# Altium PCB Diode.PcbDoc
Units mm, origin at the board's own origin, x right, y up, seen from the top; angles counter-clockwise.
Board outline 199 x 10 mm, 2 copper layers (Top Layer, Bottom Layer); 40 components, 39 nets, 102 pads, 0 vias.
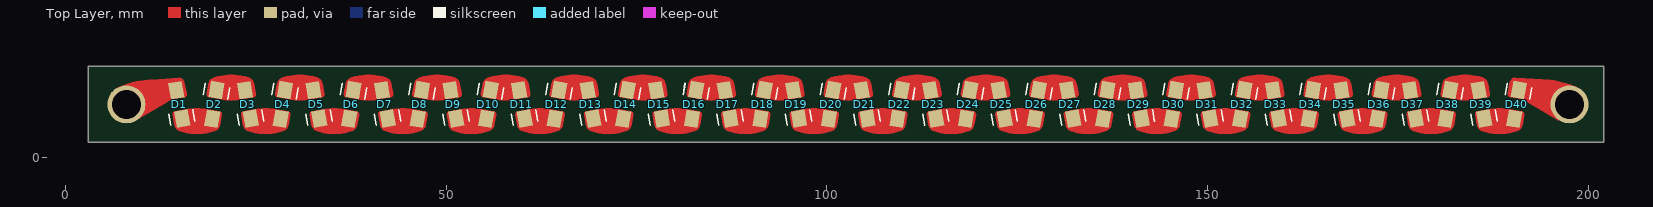
[diagram p0: Top Layer view]
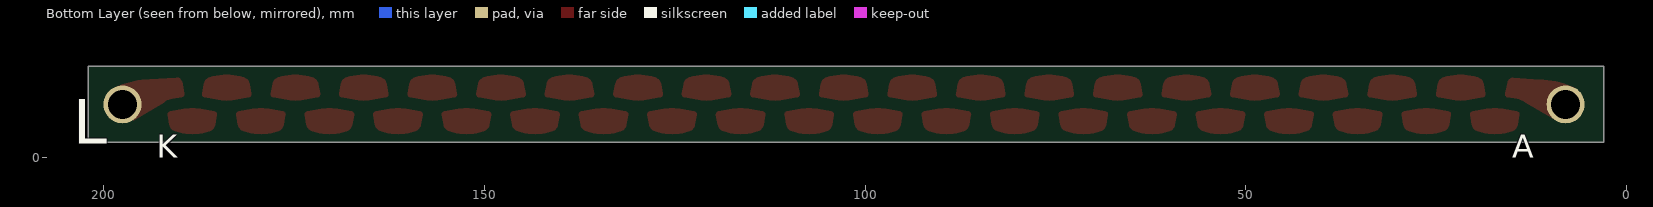
[diagram p1: Bottom Layer view, seen from below]

## Layer stack, top to bottom
Top Solder: solder mask 0.0102, Solder Resist, Dk 3.5
Top Layer: signal copper 0.0356
Dielectric 1: dielectric 0.32, FR-4, Dk 4.8
Bottom Layer: signal copper 0.0356
Bottom Solder: solder mask 0.0102, Solder Resist, Dk 3.5

## Board outline
3,2 202,2 202,12 3,12

## Design rules (kind name [scope] priority, off if disabled: settings)
Clearance [All] p1: gap=0.254 ignorepadtopadclearanceinfootprint=FALSE except(0: Arc-Hole Track-Hole SMDPad-Hole THPad-Hole Via-Hole Fill-Hole Poly-Hole Region-Hole Text-Hole)
PolygonConnect [All] p1: connectstyle=Relief reliefconductorwidth=0.254 reliefentries=4 polygonreliefangle="90 Angle" airgapwidth=0.254
RoutingVias [All] p1: holewidth=0.711 width=1.27 viastyle="Through Hole" minholewidth=0.711 minwidth=1.27 maxholewidth=0.711 maxwidth=1.27
SolderMaskExpansion [All] p1: expansion=0.102
Width [All] p1: maxlimit=0.254 minlimit=0.254 preferedwidth=0.254
30 further rules are at their usual default settings.

## Components (designator, comment, footprint, x,y, rotation, side; value= is the part's Value field where it differs from the comment)
D1 "US2MF" DO-214AC 15,7 r100 top
D2 "US2MF" DO-214AC 19.5,7 r260 top
D3 "US2MF" DO-214AC 24,7 r100 top
D4 "US2MF" DO-214AC 28.5,7 r260 top
D5 "US2MF" DO-214AC 33,7 r100 top
D6 "US2MF" DO-214AC 37.5,7 r260 top
D7 "US2MF" DO-214AC 42,7 r100 top
D8 "US2MF" DO-214AC 46.5,7 r260 top
D9 "US2MF" DO-214AC 51,7 r100 top
D10 "US2MF" DO-214AC 55.5,7 r260 top
D11 "US2MF" DO-214AC 60,7 r100 top
D12 "US2MF" DO-214AC 64.5,7 r260 top
D13 "US2MF" DO-214AC 69,7 r100 top
D14 "US2MF" DO-214AC 73.5,7 r260 top
D15 "US2MF" DO-214AC 78,7 r100 top
D16 "US2MF" DO-214AC 82.5,7 r260 top
D17 "US2MF" DO-214AC 87,7 r100 top
D18 "US2MF" DO-214AC 91.5,7 r260 top
D19 "US2MF" DO-214AC 96,7 r100 top
D20 "US2MF" DO-214AC 100.5,7 r260 top
D21 "US2MF" DO-214AC 105,7 r100 top
D22 "US2MF" DO-214AC 109.5,7 r260 top
D23 "US2MF" DO-214AC 114,7 r100 top
D24 "US2MF" DO-214AC 118.5,7 r260 top
D25 "US2MF" DO-214AC 123,7 r100 top
D26 "US2MF" DO-214AC 127.5,7 r260 top
D27 "US2MF" DO-214AC 132,7 r100 top
D28 "US2MF" DO-214AC 136.5,7 r260 top
D29 "US2MF" DO-214AC 141,7 r100 top
D30 "US2MF" DO-214AC 145.5,7 r260 top
D31 "US2MF" DO-214AC 150,7 r100 top
D32 "US2MF" DO-214AC 154.5,7 r260 top
D33 "US2MF" DO-214AC 159,7 r100 top
D34 "US2MF" DO-214AC 163.5,7 r260 top
D35 "US2MF" DO-214AC 168,7 r100 top
D36 "US2MF" DO-214AC 172.5,7 r260 top
D37 "US2MF" DO-214AC 177,7 r100 top
D38 "US2MF" DO-214AC 181.5,7 r260 top
D39 "US2MF" DO-214AC 186,7 r100 top
D40 "US2MF" DO-214AC 190.5,7 r260 top

## Footprints (in the part's own frame and the unit in brackets; to place one, negate y for a bottom-side part, rotate by r counter-clockwise, add the part's x,y. Pads: shape width x height; smd on the part's side, far side on the other; paste and mask are expansions set on the pad)
DO-214AC [mm] "SMA Diode"
  rect 2.2x1.8 smd: 1(-1.9,0) 2(1.9,0.1)
  silkscreen extent -2.5,-1.6 -1,1.65, body extent -2.8,-1.48 2.8,1.47, height 2.9

## Part data
D1 D2 D3 D4 D5 D6 D7 D8 D9 D10 D11 D12 D13 D14 D15 D16 D17 D18 D19 D20 D21 D22 D23 D24 D25 D26 D27 D28 D29 D30 D31 D32 D33 D34 D35 D36 D37 D38 D39 D40: "DIODE - HyperFast 1kV", JLC Availability=Extended, LCSC Part #=C108845, If=2A, Trr=75ns, Vrrm=1000

## Free pads (board coordinates)
  round 0 hole 2 slot 201 at 0 deg unplated: 34(102.5,1) 34(102.5,13)
  round 0 hole 0.762 unplated: 35(2.5,4) 35(2.5,5) 35(2.5,6) 35(2.5,7) 35(2.5,8) 35(2.5,9) 35(2.5,10) 35(202.5,4) 35(202.5,5) 35(202.5,6) 35(202.5,7) 35(202.5,8) 35(202.5,9) 35(202.5,10)
  round 1.524 hole 2 slot 4 at 90 deg unplated: 37(2,2) 37(2,12) 37(203,2) 37(203,12)
  round 5 hole 3.8: A(8,7) K(197.5,7)

## Nets (pads, with @x,y where several pads share a name; then routed paths per layer and width w, separated by ;. In a path a pad name is that pad's centre, name@x,y a point inside that pad or via, vN(x,y) a via of type N, cw(c..) or ccw(c..) an arc to the next point about the centre after c; other vN are vias at no path point)
NetD1_1: D1.1 D2.2
NetD2_1: D2.1 D3.2
NetD3_1: D3.1 D4.2
NetD4_1: D4.1 D5.2
NetD5_1: D5.1 D6.2
NetD6_1: D6.1 D7.2
NetD7_1: D7.1 D8.2
NetD8_1: D8.1 D9.2
NetD9_1: D9.1 D10.2
NetD10_1: D10.1 D11.2
NetD11_1: D11.1 D12.2
NetD12_1: D12.1 D13.2
NetD13_1: D13.1 D14.2
NetD14_1: D14.1 D15.2
NetD15_1: D15.1 D16.2
NetD16_1: D16.1 D17.2
NetD17_1: D17.1 D18.2
NetD18_1: D18.1 D19.2
NetD19_1: D19.1 D20.2
NetD20_1: D20.1 D21.2
NetD21_1: D21.1 D22.2
NetD22_1: D22.1 D23.2
NetD23_1: D23.1 D24.2
NetD24_1: D24.1 D25.2
NetD25_1: D25.1 D26.2
NetD26_1: D26.1 D27.2
NetD27_1: D27.1 D28.2
NetD28_1: D28.1 D29.2
NetD29_1: D29.1 D30.2
NetD30_1: D30.1 D31.2
NetD31_1: D31.1 D32.2
NetD32_1: D32.1 D33.2
NetD33_1: D33.1 D34.2
NetD34_1: D34.1 D35.2
NetD35_1: D35.1 D36.2
NetD36_1: D36.1 D37.2
NetD37_1: D37.1 D38.2
NetD38_1: D38.1 D39.2
NetD39_1: D39.1 D40.2
pads on no net: D1.2 D40.1

## Other copper
Top Layer:
  region net NetD31_1: 149.428,6.067 151.239,6.396 cw(c152.339,0.346) 153.439,6.396 155.25,6.067 cw(c155.179,5.675) 155.571,5.607 155.353,4.351 cw(c154.205,4.551) 154.56,3.441 cw(c152.339,10.396) 150.081,3.453 cw(c150.425,4.509) 149.331,4.319 149.107,5.607 cw(c149.499,5.675)
  region net NetD32_1: 159.731,7.925 157.92,7.596 cw(c156.82,13.646) 155.72,7.596 153.908,7.925 cw(c153.98,8.317) 153.587,8.386 153.806,9.641 cw(c154.953,9.441) 154.599,10.551 cw(c156.82,3.596) 159.077,10.539 cw(c158.734,9.483) 159.828,9.673 160.052,8.386 cw(c159.659,8.317)
  region net NetD34_1: 168.731,7.925 166.92,7.596 cw(c165.82,13.646) 164.72,7.596 162.908,7.925 cw(c162.98,8.317) 162.587,8.386 162.806,9.641 cw(c163.953,9.441) 163.599,10.551 cw(c165.82,3.596) 168.077,10.539 cw(c167.734,9.483) 168.828,9.673 169.052,8.386 cw(c168.659,8.317)
  region net NetD33_1: 158.428,6.067 160.239,6.396 cw(c161.339,0.346) 162.439,6.396 164.25,6.067 cw(c164.179,5.675) 164.571,5.607 164.353,4.351 cw(c163.205,4.551) 163.56,3.441 cw(c161.339,10.396) 159.081,3.453 cw(c159.425,4.509) 158.331,4.319 158.107,5.607 cw(c158.499,5.675)
  region net NetD30_1: 150.711,7.926 148.9,7.597 cw(c147.8,13.647) 146.7,7.597 144.889,7.926 cw(c144.96,8.318) 144.568,8.386 144.786,9.642 cw(c145.934,9.442) 145.579,10.552 cw(c147.8,3.597) 150.058,10.54 cw(c149.714,9.484) 150.808,9.674 151.032,8.386 cw(c150.64,8.318)
  region net NetD36_1: 177.711,7.926 175.9,7.597 cw(c174.8,13.647) 173.7,7.597 171.889,7.926 cw(c171.96,8.318) 171.568,8.386 171.786,9.642 cw(c172.934,9.442) 172.579,10.552 cw(c174.8,3.597) 177.058,10.54 cw(c176.714,9.484) 177.808,9.674 178.032,8.386 cw(c177.64,8.318)
  region net NetD39_1: 185.428,6.067 187.239,6.396 cw(c188.339,0.346) 189.439,6.396 191.25,6.067 cw(c191.179,5.675) 191.571,5.607 191.353,4.351 cw(c190.205,4.551) 190.56,3.441 cw(c188.339,10.396) 186.081,3.453 cw(c186.425,4.509) 185.331,4.319 185.107,5.607 cw(c185.499,5.675)
  region net NetD38_1: 186.731,7.925 184.92,7.596 cw(c183.82,13.646) 182.72,7.596 180.908,7.925 cw(c180.98,8.317) 180.587,8.386 180.806,9.641 cw(c181.953,9.441) 181.599,10.551 cw(c183.82,3.596) 186.077,10.539 cw(c185.734,9.483) 186.828,9.673 187.052,8.386 cw(c186.659,8.317)
  region net NetD37_1: 176.428,6.067 178.239,6.396 cw(c179.339,0.346) 180.439,6.396 182.25,6.067 cw(c182.179,5.675) 182.571,5.607 182.353,4.351 cw(c181.205,4.551) 181.56,3.441 cw(c179.339,10.396) 177.081,3.453 cw(c177.425,4.509) 176.331,4.319 176.107,5.607 cw(c176.499,5.675)
  region net NetD35_1: 167.428,6.067 169.239,6.396 cw(c170.339,0.346) 171.439,6.396 173.25,6.067 cw(c173.179,5.675) 173.571,5.607 173.353,4.351 cw(c172.205,4.551) 172.56,3.441 cw(c170.339,10.396) 168.081,3.453 cw(c168.425,4.509) 167.331,4.319 167.107,5.607 cw(c167.499,5.675)
  region: 189.735,7.952 190.987,7.743 cw(c190.596,5.405) 192.101,7.236 196.127,4.854 198.512,9.238 ccw(c193.741,-1.24) 193.906,10.272 190.456,10.525 ccw(c190.402,9.791) 189.681,9.94 189.377,8.475 ccw(c189.807,8.386)
  region net NetD25_1: 122.428,6.067 124.239,6.396 cw(c125.339,0.346) 126.439,6.396 128.25,6.067 cw(c128.179,5.675) 128.571,5.607 128.353,4.351 cw(c127.205,4.551) 127.56,3.441 cw(c125.339,10.396) 123.081,3.453 cw(c123.425,4.509) 122.331,4.319 122.107,5.607 cw(c122.499,5.675)
  region net NetD27_1: 131.428,6.067 133.239,6.396 cw(c134.339,0.346) 135.439,6.396 137.25,6.067 cw(c137.179,5.675) 137.571,5.607 137.353,4.351 cw(c136.205,4.551) 136.56,3.441 cw(c134.339,10.396) 132.081,3.453 cw(c132.425,4.509) 131.331,4.319 131.107,5.607 cw(c131.499,5.675)
  region net NetD28_1: 141.731,7.925 139.92,7.596 cw(c138.82,13.646) 137.72,7.596 135.908,7.925 cw(c135.98,8.317) 135.587,8.386 135.806,9.641 cw(c136.953,9.441) 136.599,10.551 cw(c138.82,3.596) 141.077,10.539 cw(c140.734,9.483) 141.828,9.673 142.052,8.386 cw(c141.659,8.317)
  region net NetD29_1: 140.428,6.067 142.239,6.396 cw(c143.339,0.346) 144.439,6.396 146.25,6.067 cw(c146.179,5.675) 146.571,5.607 146.353,4.351 cw(c145.205,4.551) 145.56,3.441 cw(c143.339,10.396) 141.081,3.453 cw(c141.425,4.509) 140.331,4.319 140.107,5.607 cw(c140.499,5.675)
  region net NetD26_1: 132.711,7.926 130.9,7.597 cw(c129.8,13.647) 128.7,7.597 126.889,7.926 cw(c126.96,8.318) 126.568,8.386 126.786,9.642 cw(c127.934,9.442) 127.579,10.552 cw(c129.8,3.597) 132.058,10.54 cw(c131.714,9.484) 132.808,9.674 133.032,8.386 cw(c132.64,8.318)
  region: 15.577,7.914 14.325,7.704 ccw(c14.716,5.367) 13.211,7.198 9.185,4.815 6.8,9.2 cw(c11.571,-1.279) 11.406,10.234 14.856,10.487 cw(c14.91,9.753) 15.631,9.902 15.935,8.437 cw(c15.505,8.347)
  region net NetD17_1: 86.408,6.068 88.22,6.397 cw(c89.319,0.347) 90.42,6.397 92.231,6.068 cw(c92.159,5.676) 92.552,5.607 92.333,4.352 cw(c91.186,4.552) 91.54,3.442 cw(c89.319,10.397) 87.062,3.454 cw(c87.405,4.51) 86.311,4.32 86.087,5.607 cw(c86.48,5.676)
  region net NetD18_1: 96.711,7.926 94.9,7.597 cw(c93.8,13.647) 92.7,7.597 90.889,7.926 cw(c90.96,8.318) 90.568,8.386 90.786,9.642 cw(c91.934,9.442) 91.579,10.552 cw(c93.8,3.597) 96.058,10.54 cw(c95.714,9.484) 96.808,9.674 97.032,8.386 cw(c96.64,8.318)
  region net NetD20_1: 105.711,7.926 103.9,7.597 cw(c102.8,13.647) 101.7,7.597 99.889,7.926 cw(c99.96,8.318) 99.568,8.386 99.786,9.642 cw(c100.934,9.442) 100.579,10.552 cw(c102.8,3.597) 105.058,10.54 cw(c104.714,9.484) 105.808,9.674 106.032,8.386 cw(c105.64,8.318)
  region net NetD19_1: 95.408,6.068 97.22,6.397 cw(c98.319,0.347) 99.42,6.397 101.231,6.068 cw(c101.159,5.676) 101.552,5.607 101.333,4.352 cw(c100.186,4.552) 100.54,3.442 cw(c98.319,10.397) 96.062,3.454 cw(c96.405,4.51) 95.311,4.32 95.087,5.607 cw(c95.48,5.676)
  region net NetD23_1: 113.428,6.067 115.239,6.396 cw(c116.339,0.346) 117.439,6.396 119.25,6.067 cw(c119.179,5.675) 119.571,5.607 119.353,4.351 cw(c118.205,4.551) 118.56,3.441 cw(c116.339,10.396) 114.081,3.453 cw(c114.425,4.509) 113.331,4.319 113.107,5.607 cw(c113.499,5.675)
  region net NetD24_1: 123.731,7.925 121.92,7.596 cw(c120.82,13.646) 119.72,7.596 117.908,7.925 cw(c117.98,8.317) 117.587,8.386 117.806,9.641 cw(c118.953,9.441) 118.599,10.551 cw(c120.82,3.596) 123.077,10.539 cw(c122.734,9.483) 123.828,9.673 124.052,8.386 cw(c123.659,8.317)
  region net NetD22_1: 114.731,7.925 112.92,7.596 cw(c111.82,13.646) 110.72,7.596 108.908,7.925 cw(c108.98,8.317) 108.587,8.386 108.806,9.641 cw(c109.953,9.441) 109.599,10.551 cw(c111.82,3.596) 114.077,10.539 cw(c113.734,9.483) 114.828,9.673 115.052,8.386 cw(c114.659,8.317)
  region net NetD21_1: 104.428,6.067 106.239,6.396 cw(c107.339,0.346) 108.439,6.396 110.25,6.067 cw(c110.179,5.675) 110.571,5.607 110.353,4.351 cw(c109.205,4.551) 109.56,3.441 cw(c107.339,10.396) 105.081,3.453 cw(c105.425,4.509) 104.331,4.319 104.107,5.607 cw(c104.499,5.675)
  region net NetD9_1: 50.408,6.069 52.22,6.398 cw(c53.319,0.348) 54.42,6.398 56.231,6.069 cw(c56.159,5.677) 56.552,5.609 56.333,4.354 cw(c55.186,4.553) 55.54,3.444 cw(c53.319,10.398) 51.062,3.456 cw(c51.405,4.512) 50.311,4.321 50.087,5.609 cw(c50.48,5.677)
  region net NetD10_1: 60.711,7.928 58.9,7.598 cw(c57.8,13.648) 56.7,7.598 54.889,7.928 cw(c54.96,8.32) 54.568,8.388 54.786,9.643 cw(c55.934,9.444) 55.579,10.553 cw(c57.8,3.599) 60.058,10.541 cw(c59.714,9.485) 60.808,9.676 61.032,8.388 cw(c60.64,8.32)
  region net NetD12_1: 69.711,7.928 67.9,7.598 cw(c66.8,13.648) 65.7,7.598 63.889,7.928 cw(c63.96,8.32) 63.568,8.388 63.786,9.643 cw(c64.934,9.444) 64.579,10.553 cw(c66.8,3.599) 69.058,10.541 cw(c68.714,9.485) 69.808,9.676 70.032,8.388 cw(c69.64,8.32)
  region net NetD11_1: 59.408,6.069 61.22,6.398 cw(c62.319,0.348) 63.42,6.398 65.231,6.069 cw(c65.159,5.677) 65.552,5.609 65.333,4.354 cw(c64.186,4.553) 64.54,3.444 cw(c62.319,10.398) 60.062,3.456 cw(c60.405,4.512) 59.311,4.321 59.087,5.609 cw(c59.48,5.677)
  region net NetD15_1: 77.428,6.068 79.239,6.398 cw(c80.339,0.348) 81.439,6.398 83.25,6.068 cw(c83.179,5.676) 83.571,5.608 83.353,4.353 cw(c82.205,4.553) 82.56,3.443 cw(c80.339,10.398) 78.081,3.455 cw(c78.425,4.511) 77.331,4.321 77.107,5.608 cw(c77.499,5.676)
  region net NetD16_1: 87.731,7.927 85.92,7.598 cw(c84.82,13.648) 83.72,7.598 81.908,7.927 cw(c81.98,8.319) 81.587,8.387 81.806,9.642 cw(c82.953,9.443) 82.599,10.552 cw(c84.82,3.598) 87.077,10.541 cw(c86.734,9.485) 87.828,9.675 88.052,8.387 cw(c87.659,8.319)
  region net NetD14_1: 78.731,7.927 76.92,7.598 cw(c75.82,13.648) 74.72,7.598 72.908,7.927 cw(c72.98,8.319) 72.587,8.387 72.806,9.642 cw(c73.953,9.443) 73.599,10.552 cw(c75.82,3.598) 78.077,10.541 cw(c77.734,9.485) 78.828,9.675 79.052,8.387 cw(c78.659,8.319)
  region net NetD13_1: 68.428,6.068 70.239,6.398 cw(c71.339,0.348) 72.439,6.398 74.25,6.068 cw(c74.179,5.676) 74.571,5.608 74.353,4.353 cw(c73.205,4.553) 73.56,3.443 cw(c71.339,10.398) 69.081,3.455 cw(c69.425,4.511) 68.331,4.321 68.107,5.608 cw(c68.499,5.676)
  region net NetD5_1: 32.408,6.07 34.22,6.399 cw(c35.319,0.349) 36.42,6.399 38.231,6.07 cw(c38.159,5.678) 38.552,5.61 38.333,4.355 cw(c37.186,4.554) 37.54,3.444 cw(c35.32,10.399) 33.062,3.456 cw(c33.405,4.512) 32.311,4.322 32.087,5.61 cw(c32.48,5.678)
  region net NetD6_1: 42.711,7.929 40.9,7.599 cw(c39.8,13.649) 38.7,7.599 36.889,7.929 cw(c36.96,8.32) 36.568,8.389 36.786,9.644 cw(c37.934,9.444) 37.579,10.554 cw(c39.8,3.599) 42.058,10.542 cw(c41.714,9.486) 42.808,9.676 43.032,8.389 cw(c42.64,8.32)
  region net NetD8_1: 51.711,7.929 49.9,7.599 cw(c48.8,13.649) 47.7,7.599 45.889,7.929 cw(c45.96,8.32) 45.568,8.389 45.786,9.644 cw(c46.934,9.444) 46.579,10.554 cw(c48.8,3.599) 51.058,10.542 cw(c50.714,9.486) 51.808,9.676 52.032,8.389 cw(c51.64,8.32)
  region net NetD7_1: 41.408,6.07 43.22,6.399 cw(c44.319,0.349) 45.42,6.399 47.231,6.07 cw(c47.159,5.678) 47.552,5.61 47.333,4.355 cw(c46.186,4.554) 46.54,3.444 cw(c44.319,10.399) 42.062,3.456 cw(c42.405,4.512) 41.311,4.322 41.087,5.61 cw(c41.48,5.678)
  region net NetD3_1: 23.389,6.071 25.2,6.4 cw(c26.3,0.35) 27.4,6.4 29.211,6.071 cw(c29.14,5.679) 29.532,5.611 29.314,4.355 cw(c28.166,4.555) 28.521,3.445 cw(c26.3,10.4) 24.042,3.457 cw(c24.386,4.513) 23.292,4.323 23.068,5.611 cw(c23.46,5.679)
  region net NetD4_1: 33.692,7.929 31.88,7.6 cw(c30.781,13.65) 29.68,7.6 27.869,7.929 cw(c27.941,8.321) 27.548,8.389 27.767,9.645 cw(c28.914,9.445) 28.56,10.555 cw(c30.781,3.6) 33.038,10.543 cw(c32.695,9.487) 33.789,9.677 34.013,8.389 cw(c33.62,8.321)
  region net NetD2_1: 24.692,7.929 22.88,7.6 cw(c21.781,13.65) 20.68,7.6 18.869,7.929 cw(c18.941,8.321) 18.548,8.389 18.767,9.645 cw(c19.914,9.445) 19.56,10.555 cw(c21.781,3.6) 24.038,10.543 cw(c23.695,9.487) 24.789,9.677 25.013,8.389 cw(c24.62,8.321)
  region net NetD1_1: 14.389,6.071 16.2,6.4 cw(c17.3,0.35) 18.4,6.4 20.211,6.071 cw(c20.14,5.679) 20.532,5.611 20.314,4.355 cw(c19.166,4.555) 19.521,3.445 cw(c17.3,10.4) 15.042,3.457 cw(c15.386,4.513) 14.292,4.323 14.068,5.611 cw(c14.46,5.679)
  region: 14.2,6
  region: 14,6
  region: 14.572,4

## Silkscreen, mask and mechanical layers (free items; w line width, h text height)
Bottom Overlay:
  text "A" at 15,0 h3
  text "K" at 193,0 h3
  text "L" at 204,0 h10